# EAGLE board boarddoubled (EAGLE 8.6.0)
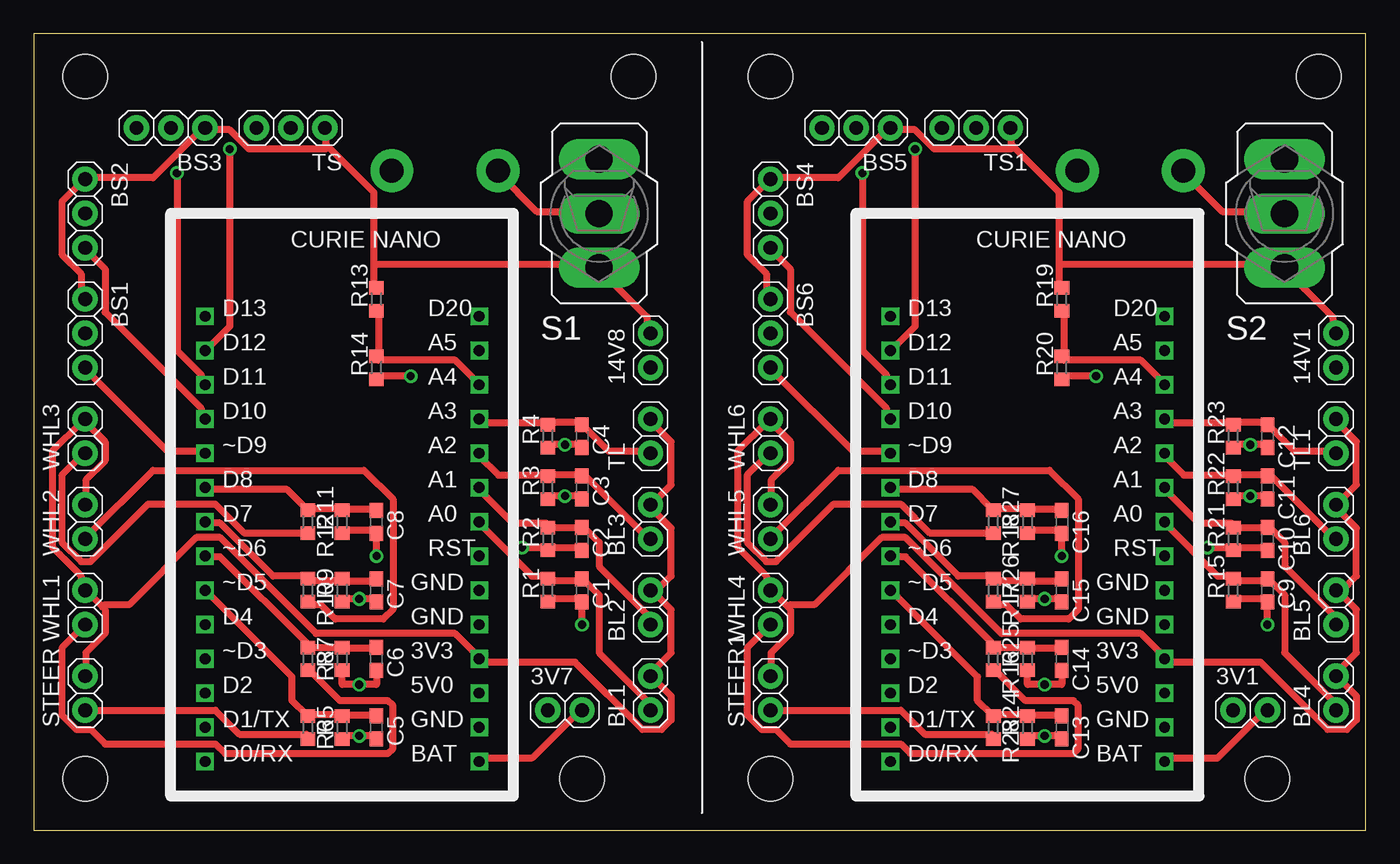
[diagram p0: board, top side]
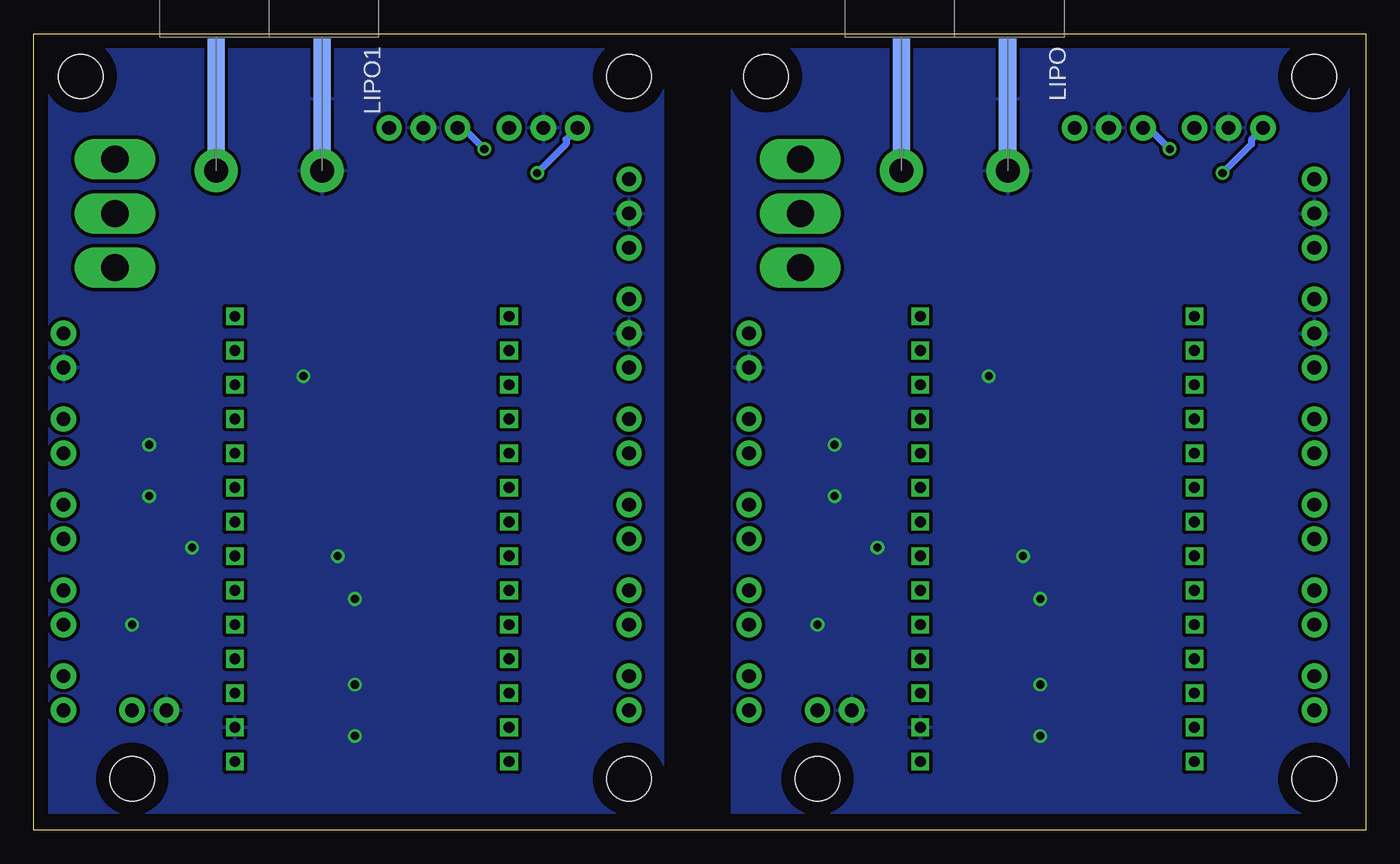
[diagram p1: board, bottom side, seen from below]

Size 98.73 x 59.05 mm. Coordinates in mm from the lower left corner, seen from the top.
Outline: 0,0 98.73,0 98.73,59.05 0,59.05 0,0
Copper layers (1*16): Top 0.035mm / dielectric 1.5mm / Bottom 0.035mm
Design rules "default": minimum track width 10mil, minimum drill 0.6mm, track to track 8mil, track to pad 8mil, pad to pad 8mil, via to via 8mil, smd to smd 8mil, copper to edge 40mil, drill to drill 8mil, minimum pad ring 10mil, minimum via ring 8mil, stop-mask expansion 4mil, vias tented up to drill 0mil, thermal gap 10mil
Net classes: 0 default: width 0.508 mm

## Footprints (pad centres in the part's own frame; a part is rotated, then mirrored left to right if it is on the bottom)
1X02 = drill 1.016 pad 1.88: 1 -1.27,0; 2 1.27,0
1X03 = drill 1.016 pad 1.88: 1 -2.54,0; 2 0,0; 3 2.54,0
C0603 = smd 1.1 x 1: 1 -0.85,0; 2 0.85,0
STAND-OFF = hole 3.302: 0,0
ANDERSON_HORIZONTAL = drill 1.778 pad 3.175: PIN1 0,3.937; PIN2 0,-3.937 | smd 8.89 x 1.27: PIN1-LEAD -5.334,3.937; PIN2-LEAD -5.334,-3.937
R0603 = smd 1 x 1.1: 1 -0.85,0; 2 0.85,0
320-916 = drill 2.007 long: 1 0,4.013; 2 0,0; 3 0,-4.013
CURIENANO = drill 0.8 square: 3V3 20.32,7.62; 5V0 20.32,5.08; A0 20.32,17.78; A1 20.32,20.32; A2 20.32,22.86; A3 20.32,25.4; A4 20.32,27.94; A5 20.32,30.48; BAT 20.32,0; D0/RX 0,0; D1/TX 0,2.54; D2 0,5.08; D4 0,10.16; D7 0,17.78; D8 0,20.32; D10 0,25.4; D11 0,27.94; D12 0,30.48; D13 0,33.02; D20 20.32,33.02; GND 20.32,12.7; GND2 20.32,10.16; GND3 20.32,2.54; RST 20.32,15.24; ~D3 0,7.62; ~D5 0,12.7; ~D6 0,15.24; ~D9 0,22.86

## Placement (x,y rotation side)
3V1  [1X02]  90.17,8.89 0 top
3V7  [1X02]  39.37,8.89 0 top
14V1  [1X02]  96.52,35.56 90 top
14V8  [1X02]  45.72,35.56 90 top
BL1  [1X02]  45.72,10.16 90 top
BL2  [1X02]  45.72,16.51 90 top
BL3  [1X02]  45.72,22.86 90 top
BL4  [1X02]  96.52,10.16 90 top
BL5  [1X02]  96.52,16.51 90 top
BL6  [1X02]  96.52,22.86 90 top
BS1  [1X03]  3.81,36.83 270 top
BS2  [1X03]  3.81,45.72 270 top
BS3  [1X03]  10.16,52.07 180 top
BS4  [1X03]  54.61,45.72 270 top
BS5  [1X03]  60.96,52.07 180 top
BS6  [1X03]  54.61,36.83 270 top
C1  0.1u  [C0603]  40.64,17.78 270 top
C2  0.1u  [C0603]  40.64,21.59 270 top
C3  0.1u  [C0603]  40.64,25.4 270 top
C4  0.1u  [C0603]  40.64,29.21 270 top
C5  1n  [C0603]  25.4,7.62 270 top
C6  1n  [C0603]  25.4,12.7 270 top
C7  1n  [C0603]  25.4,17.78 270 top
C8  1n  [C0603]  25.4,22.86 270 top
C9  0.1u  [C0603]  91.44,17.78 270 top
C10  0.1u  [C0603]  91.44,21.59 270 top
C11  0.1u  [C0603]  91.44,25.4 270 top
C12  0.1u  [C0603]  91.44,29.21 270 top
C13  1n  [C0603]  76.2,7.62 270 top
C14  1n  [C0603]  76.2,12.7 270 top
C15  1n  [C0603]  76.2,17.78 270 top
C16  1n  [C0603]  76.2,22.86 270 top
JP1  STAND-OFF  [STAND-OFF]  54.61,3.81 0 top
JP2  STAND-OFF  [STAND-OFF]  91.44,3.81 0 top
JP3  STAND-OFF  [STAND-OFF]  54.61,55.88 0 top
JP4  STAND-OFF  [STAND-OFF]  95.25,55.88 0 top
JP13  STAND-OFF  [STAND-OFF]  3.81,3.81 0 top
JP14  STAND-OFF  [STAND-OFF]  40.64,3.81 0 top
JP15  STAND-OFF  [STAND-OFF]  3.81,55.88 0 top
JP16  STAND-OFF  [STAND-OFF]  44.45,55.88 0 top
LIPO  ANDERSONHORIZONTAL  [ANDERSON_HORIZONTAL]  30.48,48.9 270 bottom
LIPO1  ANDERSONHORIZONTAL  [ANDERSON_HORIZONTAL]  81.28,48.9 270 bottom
R1  5.1k  [R0603]  38.1,17.78 90 top
R2  5.1k  [R0603]  38.1,21.59 90 top
R3  5.1k  [R0603]  38.1,25.4 90 top
R4  5.1k  [R0603]  38.1,29.21 90 top
R5  10k  [R0603]  22.86,7.62 90 top
R6  1k  [R0603]  20.32,7.62 270 top
R7  10k  [R0603]  22.86,12.7 90 top
R8  1k  [R0603]  20.32,12.7 270 top
R9  10k  [R0603]  22.86,17.78 90 top
R10  1k  [R0603]  20.32,17.78 270 top
R11  10k  [R0603]  22.86,22.86 90 top
R12  1k  [R0603]  20.32,22.86 270 top
R13  10K  [R0603]  25.4,39.37 90 top
R14  1K  [R0603]  25.4,34.29 90 top
R15  5.1k  [R0603]  88.9,17.78 90 top
R16  1k  [R0603]  71.12,12.7 270 top
R17  1k  [R0603]  71.12,17.78 270 top
R18  1k  [R0603]  71.12,22.86 270 top
R19  10K  [R0603]  76.2,39.37 90 top
R20  1K  [R0603]  76.2,34.29 90 top
R21  5.1k  [R0603]  88.9,21.59 90 top
R22  5.1k  [R0603]  88.9,25.4 90 top
R23  5.1k  [R0603]  88.9,29.21 90 top
R24  10k  [R0603]  73.66,7.62 90 top
R25  10k  [R0603]  73.66,12.7 90 top
R26  10k  [R0603]  73.66,17.78 90 top
R27  10k  [R0603]  73.66,22.86 90 top
R28  1k  [R0603]  71.12,7.62 270 top
S1  [320-916]  41.91,45.72 180 top
S2  [320-916]  92.71,45.72 180 top
STEER  [1X02]  3.81,10.16 90 top
STEER1  [1X02]  54.61,10.16 90 top
TL  [1X02]  45.72,29.21 90 top
TL1  [1X02]  96.52,29.21 90 top
TS  [1X03]  19.05,52.07 180 top
TS1  [1X03]  69.85,52.07 180 top
U$1  CURIENANO_BREAKOUT  [CURIENANO]  12.7,5.08 0 top
U$2  CURIENANO_BREAKOUT  [CURIENANO]  63.5,5.08 0 top
WHL1  [1X02]  3.81,16.51 90 top
WHL2  [1X02]  3.81,22.86 90 top
WHL3  [1X02]  3.81,29.21 90 top
WHL4  [1X02]  54.61,16.51 90 top
WHL5  [1X02]  54.61,22.86 90 top
WHL6  [1X02]  54.61,29.21 90 top

## Library data of the parts
3V1 3V7 14V1 14V8 BL1-BL6 BS1-BS6 STEER STEER1 TL TL1 TS TS1 WHL1-WHL6 = ee192; PIE-INT-REF-NUM: BULK-STOCK
C1-C16 = adafruit
JP1-JP4 JP13-JP16 = ee192
LIPO LIPO1 = ee192; PIE-INT-REF-NUM: Anderson
R1-R28 = resistor
S1 S2 = switch
U$1 U$2 = Curie Nano

## Nets
3V1: 3V1.2 U$2.BAT
3V2: BL4.2 BL5.2 BL6.2 STEER1.2 TL1.2 U$2.3V3 WHL4.2 WHL5.2 WHL6.2
3V3: BL1.2 BL2.2 BL3.2 STEER.2 TL.2 U$1.3V3 WHL1.2 WHL2.2 WHL3.2
3V7: 3V7.2 U$1.BAT
14V1: 14V1.2 BS4.1 BS5.1 BS6.1 R19.2 S2.1 TS1.1
14V8: 14V8.2 BS1.1 BS2.1 BS3.1 R13.2 S1.1 TS.1
BAT_CHECK: R13.1 R14.2 U$1.A4
BAT_CHECK1: R19.1 R20.2 U$2.A4
BRAKE_P1: BL1.1 C1.1 R1.2 U$1.A0
BRAKE_P2: BL2.1 C2.1 R2.2 U$1.A1
BRAKE_P3: BL3.1 C3.1 R3.2 U$1.A2
BRAKE_P4: BL4.1 C9.1 R15.2 U$2.A0
BRAKE_P5: BL5.1 C10.1 R21.2 U$2.A1
BRAKE_P6: BL6.1 C11.1 R22.2 U$2.A2
BRAKE_PWM1: BS1.3 U$1.~D9
BRAKE_PWM2: BS2.3 U$1.D10
BRAKE_PWM3: BS3.3 U$1.D11
BRAKE_PWM4: BS5.3 U$2.D11
BRAKE_PWM5: BS4.3 U$2.D10
BRAKE_PWM6: BS6.3 U$2.~D9
GND: 3V7.1 14V8.1 BS1.2 BS2.2 BS3.2 C1.2 C2.2 C3.2 C4.2 C5.2 C6.2 C7.2 C8.2 LIPO.PIN1 LIPO.PIN1-LEAD R1.1 R2.1 R3.1 R4.1 R5.1 R7.1 R9.1 R11.1 R14.1 TS.2 U$1.GND3
GND1: 3V1.1 14V1.1 BS4.2 BS5.2 BS6.2 C9.2 C10.2 C11.2 C12.2 C13.2 C14.2 C15.2 C16.2 LIPO1.PIN1 LIPO1.PIN1-LEAD R15.1 R20.1 R21.1 R22.1 R23.1 R24.1 R25.1 R26.1 R27.1 TS1.2 U$2.GND3
N$1: R6.2 STEER.1
N$2: R8.2 WHL1.1
N$3: R10.2 WHL2.1
N$4: R12.2 WHL3.1
N$5: LIPO.PIN2 LIPO.PIN2-LEAD S1.2
N$6: R28.2 STEER1.1
N$7: R16.2 WHL4.1
N$8: R17.2 WHL5.1
N$9: R18.2 WHL6.1
N$10: LIPO1.PIN2 LIPO1.PIN2-LEAD S2.2
STEERING_P: C5.1 R5.2 R6.1 U$1.~D5
STEERING_P1: C13.1 R24.2 R28.1 U$2.~D5
TILT_P: C4.1 R4.2 TL.1 U$1.A3
TILT_P1: C12.1 R23.2 TL1.1 U$2.A3
TILT_PWM: TS.3 U$1.D12
TILT_PWM1: TS1.3 U$2.D12
WHEEL_P1: C6.1 R7.2 R8.1 U$1.~D6
WHEEL_P2: C7.1 R9.2 R10.1 U$1.D7
WHEEL_P3: C8.1 R11.2 R12.1 U$1.D8
WHEEL_P4: C16.1 R18.1 R27.2 U$2.D8
WHEEL_P5: C15.1 R17.1 R26.2 U$2.D7
WHEEL_P6: C14.1 R16.1 R25.2 U$2.~D6

## Tracks (layer width: path | path; a pad name or v marks a point on that pad's centre or on a via)
3V1
  Top 0.508: U$2.BAT 83.82,5.33 87.73,5.33 91.29,8.89 3V1.2
3V2
  Top 0.508: 55.9,16.54 54.66,17.78 WHL4.2 54.3,17.78 54.3,18.85 52.17,20.98 52.17,28.09 54.3,30.23 WHL6.2 54.66,30.23 56.08,28.8 56.08,27.38 54.66,25.96 54.66,24.18 WHL5.2 | 55.9,16.54 56.08,16.36 56.08,14.58 54.66,13.16 54.66,11.73 STEER1.2 | TL1.2 96.62,30.23 98.04,28.8 98.04,25.6 96.62,24.18 BL6.2 96.62,23.82 98.04,22.4 98.04,18.85 96.98,17.78 BL5.2 96.62,17.78 98.04,16.36 98.04,13.16 96.62,11.73 BL4.2 96.62,11.38 98.04,9.96 98.04,8.18 97.33,7.47 95.91,7.47 90.93,12.45 83.82,12.45 U$2.3V3 83.82,12.8 82.04,14.58 71.73,14.58 64.62,21.69 62.84,21.69 57.86,16.71 56.08,16.71 55.9,16.54
3V3
  Top 0.508: 5.11,16.54 3.86,17.78 WHL1.2 3.5,17.78 3.5,18.85 1.37,20.98 1.37,28.09 3.5,30.23 WHL3.2 3.86,30.23 5.28,28.8 5.28,27.38 3.86,25.96 3.86,24.18 WHL2.2 | 5.11,16.54 5.28,16.36 5.28,14.58 3.86,13.16 3.86,11.73 STEER.2 | TL.2 45.82,30.23 47.24,28.8 47.24,25.6 45.82,24.18 BL3.2 45.82,23.82 47.24,22.4 47.24,18.85 46.18,17.78 BL2.2 45.82,17.78 47.24,16.36 47.24,13.16 45.82,11.73 BL1.2 45.82,11.38 47.24,9.96 47.24,8.18 46.53,7.47 45.11,7.47 40.13,12.45 33.02,12.45 U$1.3V3 33.02,12.8 31.24,14.58 20.93,14.58 13.82,21.69 12.04,21.69 7.06,16.71 5.28,16.71 5.11,16.54
3V7
  Top 0.508: U$1.BAT 33.02,5.33 36.93,5.33 40.49,8.89 3V7.2
14V1
  Top 0.508: 14V1.2 96.27,36.98 96.27,38.05 92.71,41.6 S2.1 92.71,41.96 76,41.96 | BS6.1 54.3,39.47 54.3,41.25 52.88,42.67 52.88,46.58 54.3,48.01 BS4.1 54.66,48.36 59.64,48.36 63.2,51.92 BS5.1 63.55,51.92 65.33,51.92 66.75,50.49 72.44,50.49 72.62,50.67 | 76,41.96 76,47.3 72.62,50.67 | 76,41.96 76,40.54 R19.2 | 72.62,50.67 72.44,50.85 72.44,51.92 TS1.1
14V8
  Top 0.508: 14V8.2 45.47,36.98 45.47,38.05 41.91,41.6 S1.1 41.91,41.96 25.2,41.96 | BS1.1 3.5,39.47 3.5,41.25 2.08,42.67 2.08,46.58 3.5,48.01 BS2.1 3.86,48.36 8.84,48.36 12.4,51.92 BS3.1 12.75,51.92 14.53,51.92 15.95,50.49 21.64,50.49 21.82,50.67 | 25.2,41.96 25.2,47.3 21.82,50.67 | 25.2,41.96 25.2,40.54 R13.2 | 21.82,50.67 21.64,50.85 21.64,51.92 TS.1
BAT_CHECK
  Top 0.508: R13.1 25.55,38.41 25.55,35.2 R14.2 25.55,34.85 31.24,34.85 33.02,33.07 U$1.A4
BAT_CHECK1
  Top 0.508: R19.1 76.35,38.41 76.35,35.2 R20.2 76.35,34.85 82.04,34.85 83.82,33.07 U$2.A4
BRAKE_P1
  Top 0.508: U$1.A0 33.02,22.76 36.93,18.85 38,18.85 R1.2 38.35,18.49 40.49,18.49 C1.1 40.84,18.49 41.91,17.42 41.91,13.16 45.47,9.6 45.47,8.89 BL1.1
BRAKE_P2
  Top 0.508: U$1.A1 33.02,25.25 35.51,22.76 38,22.76 R2.2 38.35,22.4 40.49,22.4 C2.1 40.84,22.4 41.91,21.34 41.91,19.56 45.47,16 45.47,15.29 BL2.1
BRAKE_P3
  Top 0.508: U$1.A2 33.02,27.74 34.44,26.31 38,26.31 R3.2 38.35,26.31 40.49,26.31 C3.1 40.84,26.31 45.47,21.69 BL3.1
BRAKE_P4
  Top 0.508: U$2.A0 83.82,22.76 87.73,18.85 88.8,18.85 R15.2 89.15,18.49 91.29,18.49 C9.1 91.64,18.49 92.71,17.42 92.71,13.16 96.27,9.6 96.27,8.89 BL4.1
BRAKE_P5
  Top 0.508: U$2.A1 83.82,25.25 86.31,22.76 88.8,22.76 R21.2 89.15,22.4 91.29,22.4 C10.1 91.64,22.4 92.71,21.34 92.71,19.56 96.27,16 96.27,15.29 BL5.1
BRAKE_P6
  Top 0.508: U$2.A2 83.82,27.74 85.24,26.31 88.8,26.31 R22.2 89.15,26.31 91.29,26.31 C11.1 91.64,26.31 96.27,21.69 BL6.1
BRAKE_PWM1
  Top 0.508: U$1.~D9 12.4,28.09 9.91,28.09 3.86,34.14 BS1.3
BRAKE_PWM2
  Top 0.508: U$1.D10 12.4,30.58 12.4,31.29 5.28,38.41 5.28,41.6 3.86,43.03 BS2.3
BRAKE_PWM3  (via drill 0.6)
  Top 0.508: v10.62,48.72 10.62,35.56 12.4,33.78 12.4,33.07 U$1.D11
  Bottom 0.508: v10.62,48.72 8.48,50.85 8.48,51.21 8.13,51.56 7.77,51.56 7.42,51.92 BS3.3
BRAKE_PWM4  (via drill 0.6)
  Top 0.508: v61.42,48.72 61.42,35.56 63.2,33.78 63.2,33.07 U$2.D11
  Bottom 0.508: v61.42,48.72 59.28,50.85 59.28,51.21 58.93,51.56 58.57,51.56 58.22,51.92 BS5.3
BRAKE_PWM5
  Top 0.508: U$2.D10 63.2,30.58 63.2,31.29 56.08,38.41 56.08,41.6 54.66,43.03 BS4.3
BRAKE_PWM6
  Top 0.508: U$2.~D9 63.2,28.09 60.71,28.09 54.66,34.14 BS6.3
GND  (via drill 0.6)
  Top 0.508: R7.1 22.86,10.79 v24.13,10.79 25.4,10.79 C6.2 | R4.1 38.1,28.57 v39.37,28.57 40.64,28.57 C4.2 | R3.1 38.1,24.77 v39.37,24.77 40.64,24.77 C3.2 | R1.1 38.1,17.14 40.64,17.14 C1.2 v40.64,15.24 | R11.1 22.86,22.23 25.4,22.23 C8.2 v25.4,20.32 | R9.1 22.86,17.14 v24.13,17.14 25.4,17.14 C7.2 | R5.1 22.86,6.99 v24.13,6.99 25.4,6.99 C5.2 | v27.94,33.66 25.4,33.66 R14.1 | v36.2,20.95 38.1,20.95 | 38.1,20.95 40.64,20.95 C2.2 | 38.1,20.95 R2.1
  pour Bottom (isolate 0.254): 1.27,58.42 1.27,1.27 46.99,1.27 46.99,58.42
GND1  (via drill 0.6)
  Top 0.508: R25.1 73.66,10.79 v74.93,10.79 76.2,10.79 C14.2 | R23.1 88.9,28.57 v90.17,28.57 91.44,28.57 C12.2 | R22.1 88.9,24.77 v90.17,24.77 91.44,24.77 C11.2 | R15.1 88.9,17.14 91.44,17.14 C9.2 v91.44,15.24 | R27.1 73.66,22.23 76.2,22.23 C16.2 v76.2,20.32 | R26.1 73.66,17.14 v74.93,17.14 76.2,17.14 C15.2 | R24.1 73.66,6.99 v74.93,6.99 76.2,6.99 C13.2 | v78.74,33.66 76.2,33.66 R20.1 | v87,20.95 88.9,20.95 | 88.9,20.95 91.44,20.95 C10.2 | 88.9,20.95 R21.1
  pour Bottom (isolate 0.254): 52.07,58.42 52.07,1.27 97.79,1.27 97.79,58.42
N$1
  Top 0.508: STEER.1 13.46,8.89 15.24,7.11 20.22,7.11 R6.2
N$2
  Top 0.508: WHL1.1 2.08,13.51 2.08,8.53 3.15,7.47 4.22,7.47 5.28,6.4 13.46,6.4 14.17,5.69 26.26,5.69 26.62,6.04 26.62,9.25 26.26,9.6 22.71,9.6 20.57,11.73 R8.2
N$3
  Top 0.508: R10.2 20.57,16.71 21.28,16.71 22.35,15.65 25.91,15.65 26.62,16.36 26.62,24.54 24.49,26.67 8.84,26.67 3.86,21.69 WHL2.1
N$4
  Top 0.508: R12.2 20.22,22.05 15.6,22.05 13.46,24.18 8.48,24.18 4.22,19.91 3.5,19.91 2.08,21.34 2.08,26.31 3.5,27.74 WHL3.1
N$5
  Top 0.508: S1.2 41.91,45.87 37.29,45.87 34.44,48.72 LIPO.PIN2
  Bottom 0.508: LIPO.PIN2-LEAD 34.44,54.05 34.44,49.07 LIPO.PIN2
N$6
  Top 0.508: STEER1.1 64.26,8.89 66.04,7.11 71.02,7.11 R28.2
N$7
  Top 0.508: WHL4.1 52.88,13.51 52.88,8.53 53.95,7.47 55.02,7.47 56.08,6.4 64.26,6.4 64.97,5.69 77.06,5.69 77.42,6.04 77.42,9.25 77.06,9.6 73.51,9.6 71.37,11.73 R16.2
N$8
  Top 0.508: R17.2 71.37,16.71 72.09,16.71 73.15,15.65 76.71,15.65 77.42,16.36 77.42,24.54 75.29,26.67 59.64,26.67 54.66,21.69 WHL5.1
N$9
  Top 0.508: R18.2 71.02,22.05 66.4,22.05 64.26,24.18 59.28,24.18 55.02,19.91 54.3,19.91 52.88,21.34 52.88,26.31 54.3,27.74 WHL6.1
N$10
  Top 0.508: S2.2 92.71,45.87 88.09,45.87 85.24,48.72 LIPO1.PIN2
  Bottom 0.508: LIPO1.PIN2-LEAD 85.24,54.05 85.24,49.07 LIPO1.PIN2
STEERING_P
  Top 0.508: C5.1 25.2,8.53 23.06,8.53 R5.2 22.71,8.53 20.57,8.53 R6.1 20.22,8.53 19.15,9.6 19.15,11.38 12.75,17.78 U$1.~D5
STEERING_P1
  Top 0.508: C13.1 76,8.53 73.86,8.53 R24.2 73.51,8.53 71.37,8.53 R28.1 71.02,8.53 69.95,9.6 69.95,11.38 63.55,17.78 U$2.~D5
TILT_P
  Top 0.508: U$1.A3 33.02,30.23 38,30.23 R4.2 38.35,30.23 40.49,30.23 C4.1 40.84,29.87 42.62,28.09 45.47,28.09 TL.1
TILT_P1
  Top 0.508: U$2.A3 83.82,30.23 88.8,30.23 R23.2 89.15,30.23 91.29,30.23 C12.1 91.64,29.87 93.42,28.09 96.27,28.09 TL1.1
TILT_PWM  (via drill 0.6)
  Top 0.508: v14.53,50.49 14.53,37.34 12.75,35.56 U$1.D12
  Bottom 0.508: v14.53,50.49 16.31,52.27 TS.3
TILT_PWM1  (via drill 0.6)
  Top 0.508: v65.33,50.49 65.33,37.34 63.55,35.56 U$2.D12
  Bottom 0.508: v65.33,50.49 67.11,52.27 TS1.3
WHEEL_P1
  Top 0.508: C6.1 25.2,13.51 23.06,13.51 R7.2 22.71,13.51 20.57,13.51 R8.1 20.22,13.87 13.82,20.27 12.75,20.27 U$1.~D6
WHEEL_P2
  Top 0.508: C7.1 25.2,18.49 23.06,18.49 R9.2 22.71,18.49 20.57,18.49 R10.1 20.22,18.85 17.73,18.85 13.82,22.76 12.75,22.76 U$1.D7
WHEEL_P3
  Top 0.508: C8.1 25.2,23.82 23.06,23.82 R11.2 22.71,23.82 20.57,23.82 R12.1 20.22,23.82 18.8,25.25 12.75,25.25 U$1.D8
WHEEL_P4
  Top 0.508: C16.1 76,23.82 73.86,23.82 R27.2 73.51,23.82 71.37,23.82 R18.1 71.02,23.82 69.6,25.25 63.55,25.25 U$2.D8
WHEEL_P5
  Top 0.508: C15.1 76,18.49 73.86,18.49 R26.2 73.51,18.49 71.37,18.49 R17.1 71.02,18.85 68.53,18.85 64.62,22.76 63.55,22.76 U$2.D7
WHEEL_P6
  Top 0.508: C14.1 76,13.51 73.86,13.51 R25.2 73.51,13.51 71.37,13.51 R16.1 71.02,13.87 64.62,20.27 63.55,20.27 U$2.~D6